# EAGLE board routev2.2 (EAGLE 8.6.0)
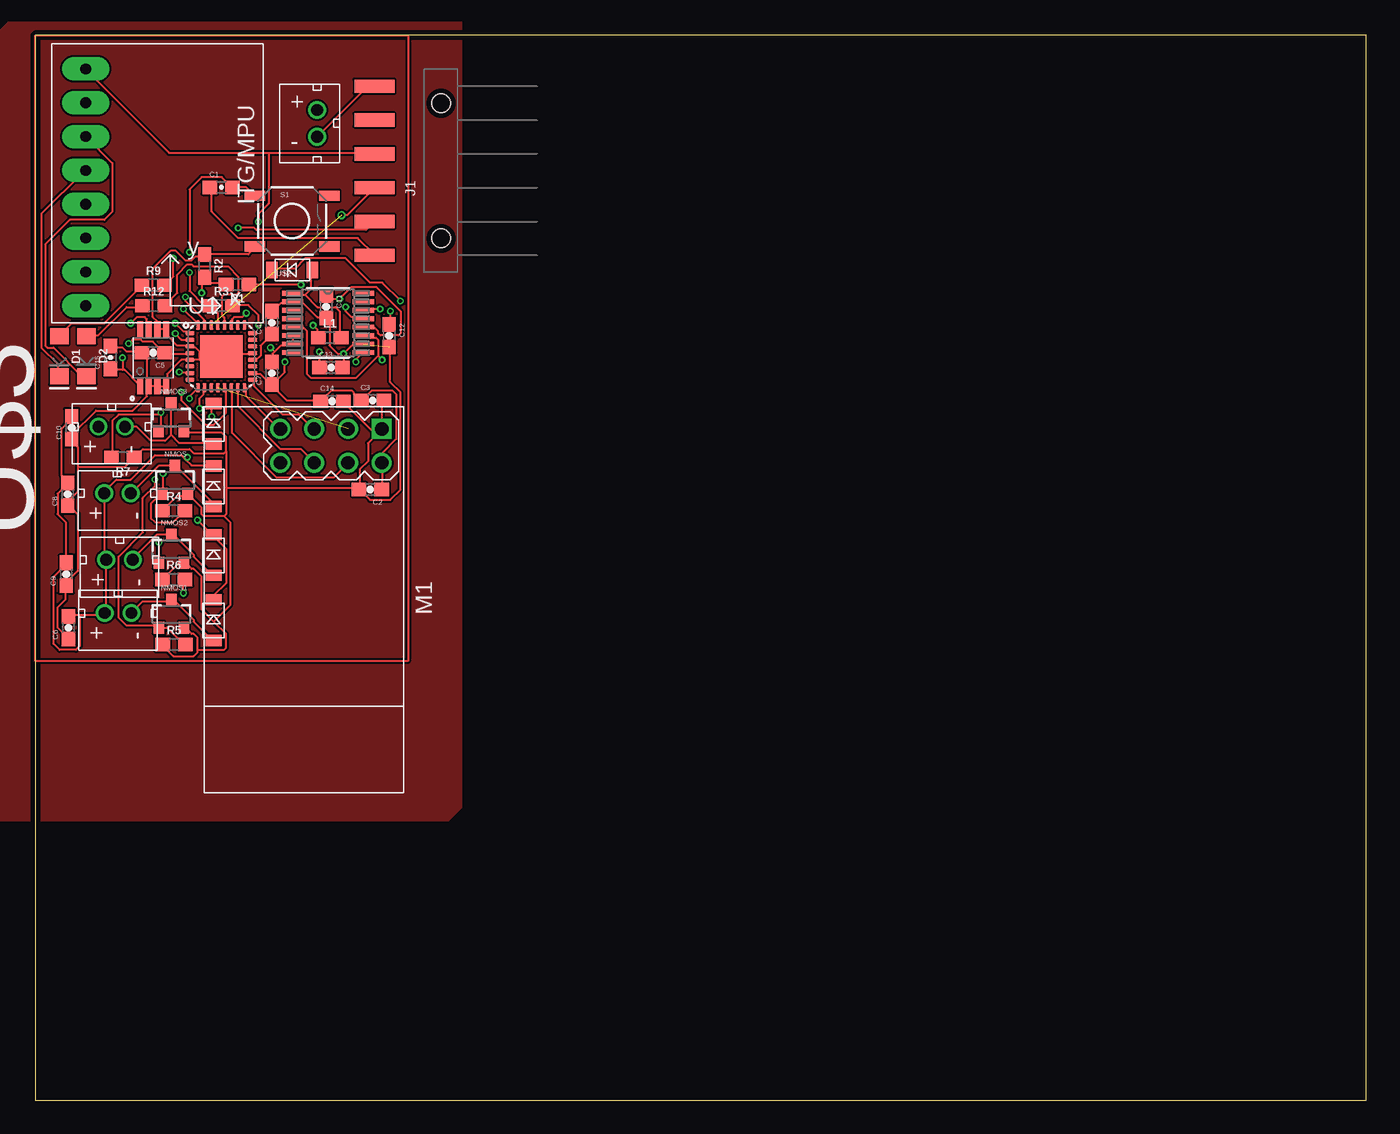
[diagram p0: board, top side]
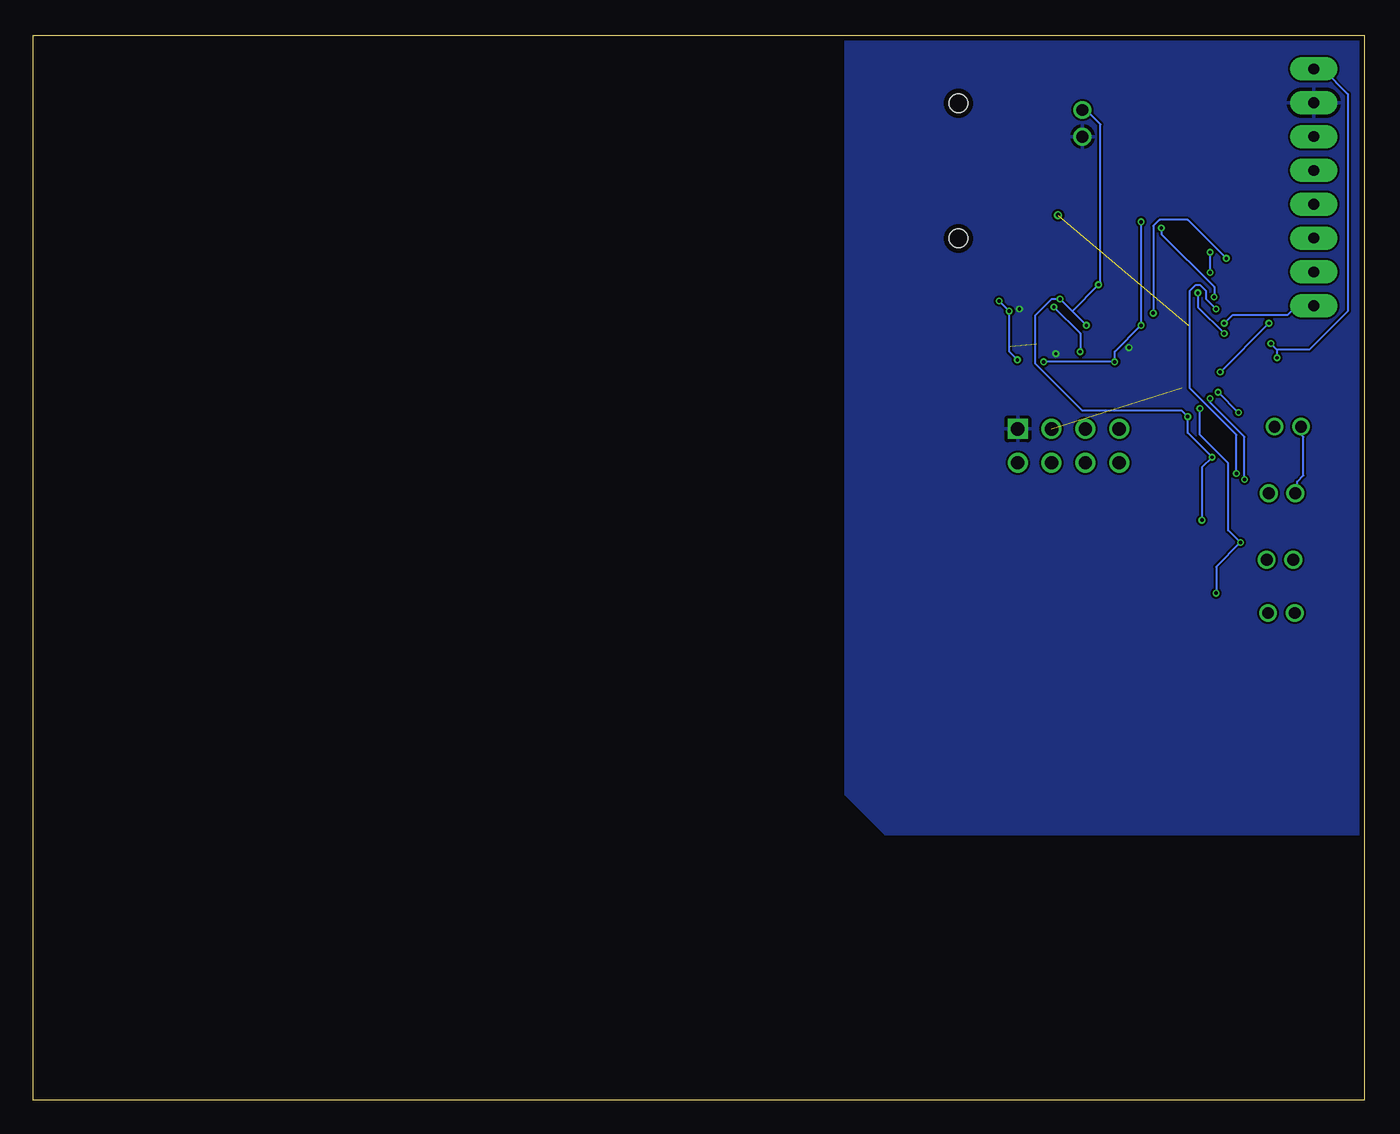
[diagram p1: board, bottom side, seen from below]

Size 100 x 80 mm. Coordinates in mm from the lower left corner, seen from the top.
Outline: 0,0 100,0 100,80 0,80 0,0
Copper layers (1*16): Top 0.035559375mm / dielectric 1.6mm / Bottom 0.035559375mm
Design rules "oshpark-2layer": minimum track width 6mil, minimum drill 10mil, track to track 6mil, track to pad 6mil, pad to pad 6mil, via to via 6mil, smd to smd 6mil, copper to edge 15mil, drill to drill 6mil, minimum pad ring 5mil, minimum via ring 5mil, stop-mask expansion 2.5mil, vias tented up to drill 0mil, thermal gap 10mil

## Footprints (pad centres in the part's own frame; a part is rotated, then mirrored left to right if it is on the bottom)
0603-CAP = smd 1.1 x 1: 1 -0.85,0; 2 0.85,0
LED-1206 = smd 1.2 x 1.4: A -1.5,0; C 1.5,0
MINI2-F3-B = smd 1.22 x 0.85: NEG 0,1.55; POS 0,-1.5
FTDI_DEVICE_RA_SMT = smd 1 x 3: 1 -6.35,5; 2 -3.81,5; 3 -1.27,5; 4 1.27,5; 5 3.81,5; 6 6.35,5 | hole 1.4: -5.08,0; 5.08,0
0603 = smd 1.1 x 1: 1 -0.85,0; 2 0.85,0
WIRELESS-NRF24L01 = drill 1 square: 1 -12.7,6.35 | drill 1: 2 -10.16,6.35; 3 -12.7,3.81; 4 -10.16,3.81; 5 -12.7,1.27; 6 -10.16,1.27; 7 -12.7,-1.27; 8 -10.16,-1.27
JST_CONNECTOR_FEMALE = drill 0.889: + 0,1; - 0,-1
SOT23-3 = smd 0.8 x 0.9: 1 -0.95,-1; 2 0.95,-1; 3 0,1.1
TACTILE-SWITCH-SMD = smd 1.524 x 0.762: 1 -2.794,1.905; 2 2.794,1.905; 3 -2.794,-1.905; 4 2.794,-1.905
MLF32-PAD = smd 0.7 x 0.3: 1 -2.35,1.75; 2 -2.35,1.25; 3 -2.35,0.75; 4 -2.35,0.25; 5 -2.35,-0.25; 6 -2.35,-0.75; 7 -2.35,-1.25; 8 -2.35,-1.75; 17 2.35,-1.75; 18 2.35,-1.25; 19 2.35,-0.75; 20 2.35,-0.25; 21 2.35,0.25; 22 2.35,0.75; 23 2.35,1.25; 24 2.35,1.75 | smd 0.3 x 0.7: 9 -1.75,-2.35; 10 -1.25,-2.35; 11 -0.75,-2.35; 12 -0.25,-2.35; 13 0.25,-2.35; 14 0.75,-2.35; 15 1.25,-2.35; 16 1.75,-2.35; 25 1.75,2.35; 26 1.25,2.35; 27 0.75,2.35; 28 0.25,2.35; 29 -0.25,2.35; 30 -0.75,2.35; 31 -1.25,2.35; 32 -1.75,2.35 | smd 3.2 x 3.2: PAD 0,0
GY-521 = drill 0.8 pad 1.778 long: ADO -8.89,-6.35; GND -8.89,6.35; INT -8.89,-8.89; SCL -8.89,3.81; SDA -8.89,1.27; VCC -8.89,8.89; XCL -8.89,-3.81; XDA -8.89,-1.27
21-0055H_16 = smd 1.6 x 0.356: 1 -2.654,2.223; 2 -2.654,1.587; 3 -2.654,0.953; 4 -2.654,0.318; 5 -2.654,-0.318; 6 -2.654,-0.953; 7 -2.654,-1.587; 8 -2.654,-2.223; 9 2.654,-2.223; 10 2.654,-1.587; 11 2.654,-0.953; 12 2.654,-0.318; 13 2.654,0.318; 14 2.654,0.953; 15 2.654,1.587; 16 2.654,2.223
SOP65P490X110-8N = smd 1.25 x 0.46: 1 -2.11,0.975; 2 -2.11,0.325; 3 -2.11,-0.325; 4 -2.11,-0.975; 5 2.11,-0.975; 6 2.11,-0.325; 7 2.11,0.325; 8 2.11,0.975

## Placement (x,y rotation side)
C1  100nF  [0603-CAP]  13.97,68.58 0 top
C2  10uF  [0603-CAP]  25.17,45.89 180 top
C3  100nF  [0603-CAP]  25.33,52.57 0 top
C4  100nF  [0603-CAP]  17.78,58.42 90 top
C5  100nF  [0603-CAP]  8.85,56.16 180 top
C6  100uF  [0603-CAP]  2.49,35.5 90 top
C7  100nF  [0603-CAP]  17.78,54.61 90 top
C8  100uF  [0603-CAP]  2.44,45.53 90 top
C9  100uF  [0603-CAP]  2.33,39.53 90 top
C10  100uF  [0603-CAP]  2.74,50.53 90 top
C11  100uF  [0603-CAP]  21.86,59.63 270 top
C12  100uF  [0603-CAP]  26.59,57.44 270 top
C13  0.1uF  [0603-CAP]  22.21,55.05 0 top
C14  4.7uF  [0603-CAP]  22.29,52.51 0 top
C15  100nF  [0603-CAP]  5.65,55.81 90 top
D1  Yellow  [LED-1206]  1.81,55.88 270 top
D2  Yellow  [LED-1206]  3.85,55.91 270 top
DIODE  DB2W40300L  [MINI2-F3-B]  13.39,46.1 0 top
DIODE1  DB2W40300L  [MINI2-F3-B]  13.39,36.05 0 top
DIODE2  DB2W40300L  [MINI2-F3-B]  13.39,40.94 0 top
DIODE3  DB2W40300L  [MINI2-F3-B]  13.39,50.8 0 top
DIODE4  DB2W40300L  [MINI2-F3-B]  19.33,62.37 90 top
J1  FTDI_DEVICERA_SMT  [FTDI_DEVICE_RA_SMT]  30.48,69.82 90 top
L1  10uH  [0603]  22.13,57.28 0 top
M1  WIRELESS-NRF24L01  [WIRELESS-NRF24L01]  19.68,37.74 270 top
MOTOR  JST_CONNECTOR_FEMALE  [JST_CONNECTOR_FEMALE]  6.17,45.61 90 top
MOTOR1  JST_CONNECTOR_FEMALE  [JST_CONNECTOR_FEMALE]  6.22,36.61 90 top
MOTOR2  JST_CONNECTOR_FEMALE  [JST_CONNECTOR_FEMALE]  6.33,40.61 90 top
MOTOR3  JST_CONNECTOR_FEMALE  [JST_CONNECTOR_FEMALE]  5.74,50.61 90 top
NMOS  N-CHANNEL-MOSFET-IRLML6244TRPBF  [SOT23-3]  10.5,46.56 0 top
NMOS1  N-CHANNEL-MOSFET-IRLML6244TRPBF  [SOT23-3]  10.23,36.51 0 top
NMOS2  N-CHANNEL-MOSFET-IRLML6244TRPBF  [SOT23-3]  10.23,41.4 0 top
NMOS3  N-CHANNEL-MOSFET-IRLML6244TRPBF  [SOT23-3]  10.2,51.26 0 top
R1  2.2k  [0603]  15.19,61.28 180 top
R2  2.2k  [0603]  12.72,62.68 270 top
R3  10k  [0603]  13.97,59.69 0 top
R4  10k  [0603]  10.39,44.29 0 top
R5  10k  [0603]  10.42,34.24 0 top
R6  10k  [0603]  10.39,39.13 0 top
R7  10k  [0603]  6.58,48.28 180 top
R9  1k  [0603]  8.86,61.23 0 top
R12  1k  [0603]  8.89,59.69 0 top
S1  SWITCH-MOMENTARY-2SMD  [TACTILE-SWITCH-SMD]  19.29,66.04 0 top
U1  3.3V  [MLF32-PAD]  13.97,55.88 0 top
U2  GY-521MPU6050  [GY-521]  12.67,68.58 0 top
U$1  JST_CONNECTOR_FEMALE  [JST_CONNECTOR_FEMALE]  21.17,73.39 0 top
U$2  MAX1672'MAX1672'  [21-0055H_16]  21.99,58.4 0 top
U$3  LTC6930CMS8-8.19LTC6930CMS8-8.19  [SOP65P490X110-8N]  8.85,55.77 90 top

## Library data of the parts
C1 C15 = SparkFun-Capacitors; PROD_ID: CAP-00810
C2-C14 = SparkFun-Passives
D1 D2 = SparkFun-LED; PROD_ID: DIO-09909
DIODE DIODE1-DIODE4 M1 MOTOR MOTOR1-MOTOR3 U2 U$1 = quad
J1 = quad; PROD_ID: CONN-08971
L1 = SparkFun-Coils; PROD_ID: NDUC-07874
NMOS NMOS1-NMOS3 = quad; DATASHEET: http://www.mouser.com/ds/2/196/irlml6244pbf-936666.pdf; MOUSER: 942-IRLML6244TRPBF; URL: http://www.mouser.com/Search/ProductDetail.aspx?R=IRLML6244TRPBFvirtualkey57370000virtualkey942-IRLML6244TRPBF
R1-R7 R9 R12 = SparkFun-Resistors; PROD_ID: RES-08272
S1 = quad; PROD_ID: SWCH-08247
U1 = SparkFun-DigitalIC
U$2 = voltreg
U$3 = LTC6390

## Nets
BATTERY+: C6.2 C8.2 C9.2 C10.2 C11.1 DIODE1.NEG DIODE2.NEG DIODE3.NEG DIODE.NEG L1.1 MOTOR1.+ MOTOR2.+ MOTOR3.+ MOTOR.+ R1.1 U$1.+ U$2.12
FTDI-RX: J1.3 U1.30
FTDI-TX: J1.2 U1.31
GND: C2.2 C3.2 C4.2 C5.2 C6.1 C7.2 C8.1 C9.1 C10.1 C11.2 C12.2 C13.2 C14.2 C15.2 J1.6 M1.1 NMOS1.2 NMOS2.2 NMOS3.2 NMOS.2 R2.1 R4.1 R5.1 R6.1 R7.1 S1.3 U1.3 U1.5 U1.21 U1.PAD U2.GND U$1.- U$2.2 U$2.6 U$2.7 U$2.10 U$2.14 U$3.2 U$3.3 U$3.4 U$3.5 U$3.6
IMU-INT: U1.1 U2.INT
IMU-SCL: D2.C U2.SCL
IMU-SDA: D1.C U2.SDA
MEASURE_PIN: R1.2 R2.2 U1.2
MOTOR1: NMOS.1 R4.2 U1.32
MOTOR2: NMOS1.1 R5.2 U1.9
MOTOR3: NMOS2.1 R6.2 U1.10
MOTOR4: NMOS3.1 R7.2 U1.13
N$1: DIODE4.POS L1.2 U$2.1
N$2: C4.1 U1.20
N$3: R9.2 U1.27
N$4: DIODE1.POS MOTOR1.- NMOS1.3
N$5: DIODE2.POS MOTOR2.- NMOS2.3
N$6: DIODE.POS MOTOR.- NMOS.3
N$7: DIODE3.POS MOTOR3.- NMOS3.3
N$8: D1.A R9.1
N$9: D2.A R12.1
N$10: R12.2 U1.28
N$13: C1.1 J1.1
OSC1: U1.7 U$3.7
RESET: C1.2 R3.1 S1.1 U1.29
RF-CE: M1.3 U1.12
RF-CSN: M1.4 U1.14
RF-MISO: M1.7 U1.16
RF-MOSI: M1.6 U1.15
RF-SCK: M1.5 U1.17
VCC: C2.1 C3.1 C5.1 C7.1 C14.1 C15.1 J1.4 M1.2 R3.2 U1.4 U1.18 U2.VCC U$2.9 U$3.1 U$3.8
VR-PS: C12.1 DIODE4.NEG U$2.5 U$2.11
VR-REF: C13.1 U$2.13

## Tracks (layer width: path | path; a pad name or v marks a point on that pad's centre or on a via)
BATTERY+  (via drill 0.25)
  Top 0.152: v20.88,58.22 21.18,57.91 21.18,57.3 L1.1 | C11.1 21.95,60.35 22.1,60.2 v22.86,60.2 23.77,61.11 25.6,61.11 27.43,59.28 27.43,57.61 27.28,57.45 25.91,57.45 25.76,57.61 25.76,57.76 25.45,58.06 24.69,58.06 U$2.12 | v19.96,61.27 16.15,61.27 R1.1 | C10.2 2.59,51.36 2.59,51.05 1.98,50.44 1.98,46.94 2.44,46.48 C8.2 2.44,46.33 1.68,45.57 1.68,44.04 2.29,43.43 2.29,40.39 C9.2 2.29,40.23 1.37,39.32 1.37,34.29 1.83,33.83 3.05,33.83 3.35,34.14 3.35,36.42 | 3.35,36.42 5.03,36.42 5.18,36.58 MOTOR1.+ 5.33,36.73 5.33,40.54 MOTOR2.+ 5.18,40.69 5.18,45.57 MOTOR.+ 5.18,45.72 6.1,46.63 7.16,46.63 8.99,48.46 10.97,48.46 11.28,48.16 | 3.35,36.42 2.59,36.42 C6.2 | DIODE1.NEG 13.41,37.64 13.41,37.95 14.33,38.86 14.33,41.45 13.41,42.37 DIODE2.NEG 13.26,42.52 v12.19,43.59 | 11.28,48.16 11.73,47.7 13.26,47.7 DIODE.NEG | v13.26,51.36 13.26,52.27 DIODE3.NEG | 11.28,48.16 v11.43,48.31
  Bottom 0.152: 21.95,59.28 v22.86,60.2 23.47,60.2 24.69,58.98 24.69,55.32 21.18,51.82 13.72,51.82 v13.26,51.36 13.26,50.14 v11.43,48.31 12.19,47.55 v12.19,43.59 | 21.95,59.28 v20.88,58.22 | 21.95,59.28 v19.96,61.27 19.81,61.42 19.81,73.3 20.57,74.07 20.73,74.07 21.03,74.37 U$1.+ | MOTOR3.+ 4.72,50.6 4.72,49.99 4.57,49.84 4.57,46.94 5.03,46.48 5.03,45.72 MOTOR.+
BATTERY_+
  pour Top: -2,81 32,81 32,22 31,21 -4,21 -6,23 -6,77
FTDI-RX  (via drill 0.35)  (1 unrouted)
  Top 0.152: J1.3 23.43,66.5 v23,66.5
FTDI-TX  (via drill 0.25)
  Top 0.152: v11.28,60.35 11.28,60.05 12.65,58.67 12.65,58.37 U1.31 | v15.24,65.53 16.46,65.53 16.61,65.38 24.84,65.38 25.45,65.99 J1.2
  Bottom 0.152: v11.28,60.35 11.28,61.11 15.24,65.08 v15.24,65.53
GND  (via drill 0.25)  (1 unrouted)
  Top 0.152: v23.16,56.08 23.16,55.17 C13.2 | v23.16,56.08 23.77,56.69 24.54,56.69 U$2.10 | C4.2 17.83,59.28 18.44,59.89 19.2,59.89 U$2.2 19.36,59.89 20.12,59.89 21.18,58.83 21.79,58.83 C11.2 21.95,58.67 22.1,58.52 22.1,56.69 22.71,56.08 v23.16,56.08 | 17.98,56.24 18.44,56.69 19.2,56.69 U$2.7 19.36,56.84 19.36,57.3 U$2.6 | 17.98,56.24 17.83,56.08 17.83,55.47 C7.2 | 25.6,49.99 25.91,50.29 M1.1 | 25.6,49.99 24.99,49.38 24.99,48.01 24.38,47.4 24.38,46.02 C2.2 | 25.6,49.99 23.16,52.43 C14.2 | 25.6,49.99 M1.1 | C3.2 26.06,52.43 26.06,50.44 M1.1 | C12.2 26.67,56.54 26.67,53.95 27.43,53.19 27.43,45.87 26.67,45.11 25.15,45.11 24.38,45.87 C2.2 | v25.91,59.44 24.69,59.44 U$2.14 | v17.68,56.54 17.98,56.24 | J1.6 25.45,76.05 24.84,76.05 21.18,72.39 U$1.- | U$3.2 8.53,53.65 9.14,53.65 U$3.3 9.3,53.65 9.75,53.65 U$3.4 9.91,53.8 9.91,54.56 10.97,55.63 11.58,55.63 U1.5 11.73,55.63 12.34,55.63 | C15.2 5.79,56.54 6.55,56.54 6.86,56.24 7.92,56.24 C5.2 8.08,56.08 8.38,55.78 8.38,53.8 U$3.2 | S1.3 16.46,64.01 16,63.55 12.8,63.55 R2.1 12.65,63.4 12.04,63.4 11.73,63.09 11.28,63.09 10.52,63.86 10.21,63.86 8.84,62.48 8.84,58.83 9.14,58.52 9.14,57.91 U$3.6 9.3,57.91 9.75,57.91 U$3.5 9.91,57.76 9.91,57.45 10.67,56.69 11.58,56.69 U1.3 11.73,56.54 12.04,56.54 12.34,56.24 12.34,55.63 | 12.34,55.63 13.72,55.63 U1.PAD 14.17,56.08 16.31,56.08 U1.21 | C6.1 2.44,34.75 1.68,35.51 1.68,37.03 2.29,37.64 2.29,38.56 C9.1 2.44,38.71 2.44,39.01 3.2,39.78 3.2,44.04 2.59,44.65 C8.1 2.59,44.81 2.59,45.11 3.2,45.72 3.2,47.55 | 3.2,47.55 3.2,49.07 2.74,49.53 C10.1 2.74,49.99 4.57,51.82 7.32,51.82 8.38,52.88 8.38,53.65 U$3.2
  Top 0.152: R6.1 9.6,39.17 10.82,40.39 11.12,40.39 NMOS2.2 11.28,40.39 11.73,39.93 11.89,39.93 12.5,39.32 12.5,36.88 13.41,35.97 | 12.19,33.83 12.19,33.68 11.89,33.38 10.36,33.38 9.6,34.14 R5.1 | 12.19,33.83 12.19,34.75 11.89,35.05 11.73,35.05 11.28,35.51 NMOS1.2 | 13.41,35.97 14.33,35.05 14.33,33.98 14.17,33.83 12.19,33.83 | R4.1 9.6,44.35 10.67,45.41 11.43,45.41 NMOS.2 11.58,45.41 12.5,44.5 12.5,44.04 12.65,43.89 14.17,43.89 | 14.33,48.77 14.33,49.84 14.02,50.14 11.28,50.14 NMOS3.2 | 14.33,48.77 14.17,48.62 11.89,48.62 11.58,48.92 8.08,48.92 7.47,48.31 R7.1 7.32,48.16 6.71,47.55 3.2,47.55 | 14.17,43.89 14.33,44.04 14.33,46.02 | 14.33,48.77 14.33,46.02 | 13.41,35.97 14.63,37.19 14.63,43.43 14.17,43.89 | 14.33,46.02 24.23,46.02 C2.2
  pour Bottom: -3,81 39,81 39,23 36,20 -6,20 -6,78
IMU-INT  (via drill 0.25)
  Top 0.152: v10.52,58.37 11.12,57.76 11.58,57.76 U1.1
  Bottom 0.152: v10.52,58.37 9.91,58.98 5.79,58.98 5.18,59.59 3.81,59.59 U2.INT
IMU-SCL
  Top 0.152: D2.C 3.81,54.41 3.5,54.41 1.37,56.54 0.91,56.54 0.76,56.69 0.76,64.31 2.59,66.14 5.18,66.14 5.79,66.75 5.79,70.41 3.81,72.39 U2.SCL
IMU-SDA
  Top 0.152: D1.C 1.68,54.41 1.68,55.32 0.46,56.54 0.46,66.6 3.66,69.8 U2.SDA
MEASURE_PIN  (via drill 0.25)
  Top 0.152: v10.52,57.61 10.97,57.15 11.58,57.15 U1.2 | v12.5,60.66 12.5,61.57 12.65,61.72 R2.2 12.8,61.72 13.11,61.42 14.33,61.42 R1.2
  Bottom 0.152: v10.52,57.61 12.5,59.59 v12.5,60.66
MOTOR1  (via drill 0.25)
  Top 0.152: v11.12,59.44 12.19,58.37 U1.32 | v9.6,47.09 9.6,45.57 NMOS.1 9.45,45.57 8.69,44.81 8.69,43.74 8.99,43.43 10.36,43.43 11.12,44.2 R4.2
  Bottom 0.152: v11.12,59.44 11.89,60.2 11.89,60.81 12.34,61.27 12.65,61.27 13.11,60.81 13.11,53.49 9.6,49.99 v9.6,47.09
MOTOR2  (via drill 0.25)
  Top 0.152: v11.58,52.73 11.58,52.88 12.19,53.49 U1.9 | v8.99,46.63 8.99,46.18 8.08,45.26 8.08,42.67 6.25,40.84 6.25,36.27 6.86,35.66 9.14,35.66 NMOS1.1 9.3,35.51 9.91,35.51 11.12,34.29 R5.2
  Bottom 0.152: v11.58,52.73 11.58,52.43 8.99,49.84 v8.99,46.63
MOTOR3  (via drill 0.25)
  Top 0.152: v12.34,51.97 12.34,52.73 12.65,53.03 12.65,53.49 U1.10 | v9.3,41.91 9.3,40.54 NMOS2.1 | v11.12,38.1 11.12,39.01 R6.2
  Bottom 0.152: v12.34,51.97 12.34,49.99 10.21,47.85 10.21,42.82 v9.3,41.91 11.12,40.08 v11.12,38.1
MOTOR4  (via drill 0.25)
  Top 0.152: v10.97,53.19 10.97,52.58 12.8,50.75 13.41,50.75 14.33,51.66 14.33,53.49 U1.13 | 9.45,51.51 9.45,50.44 9.3,50.29 NMOS3.1 | 9.45,51.51 6.25,51.51 5.79,51.05 5.79,48.31 R7.2 | 9.45,51.51 v9.45,51.66
  Bottom 0.152: v9.45,51.66 v10.97,53.19
N$1
  Top 0.152: 20.27,60.5 21.18,59.59 22.55,59.59 22.86,59.28 22.86,57.3 L1.2 | 20.27,60.5 19.36,60.5 U$2.1 | 20.27,60.5 20.73,60.96 20.73,62.33 DIODE4.POS
N$2
  Top 0.152: U1.20 16.46,55.63 16.61,55.63 16.92,55.93 16.92,56.69 17.68,57.45 C4.1
N$3  (via drill 0.25)
  Top 0.152: v15.85,59.13 15.54,58.83 14.94,58.83 14.78,58.67 14.78,58.37 U1.27 | v10.36,63.25 10.36,61.87 9.75,61.27 R9.2
  Bottom 0.152: v15.85,59.13 15.85,65.68 15.39,66.14 13.26,66.14 v10.36,63.25
N$4
  Top 0.152: MOTOR1.- 7.32,36.73 8.08,37.49 10.21,37.49 NMOS1.3 10.36,37.64 11.89,36.12 11.89,35.97 13.26,34.59 DIODE1.POS
N$5
  Top 0.152: MOTOR2.- 7.32,40.69 9.14,42.52 10.21,42.52 NMOS2.3 10.36,42.52 11.89,41 11.89,40.84 13.26,39.47 DIODE2.POS
N$6
  Top 0.152: MOTOR.- 7.32,45.72 9.3,47.7 10.36,47.7 NMOS.3 10.52,47.7 13.26,44.96 13.26,44.65 DIODE.POS
N$7
  Top 0.152: 10.21,49.99 10.21,52.27 NMOS3.3 | 10.21,49.99 10.82,49.38 13.26,49.38 DIODE3.POS | 10.21,49.99 9.75,49.53 8.69,49.53 7.62,50.6 6.86,50.6 MOTOR3.-
N$8
  Top 0.152: R9.1 7.92,61.11 5.18,58.37 2.74,58.37 1.83,57.45 D1.A
N$9
  Top 0.152: R12.1 7.92,59.59 6.86,59.59 4.72,57.45 3.96,57.45 D2.A
N$10
  Top 0.152: U1.28 14.17,58.37 14.17,58.83 14.02,58.98 14.02,60.35 14.17,60.5 15.09,60.5 15.24,60.66 15.24,61.87 14.48,62.64 11.89,62.64 11.73,62.79 11.43,62.79 10.67,62.03 10.67,60.66 9.75,59.74 R12.2
N$11
  Top 0.152: 0,80 28,80 28,33 0,33 0,80
N$13
  Top 0.152: C1.1 13.26,68.58 13.26,66.75 15.24,64.77 24.23,64.77 25.45,63.55 J1.1
OSC1  (via drill 0.25)
  Top 0.152: v10.82,54.71 11.58,54.71 U1.7 | v7.16,58.37 7.62,58.83 8.23,58.83 8.38,58.67 8.38,57.91 U$3.7
  Bottom 0.152: v7.16,58.37 v10.82,54.71
RESET  (via drill 0.25)
  Top 0.152: U1.29 13.72,58.37 13.72,59.13 13.26,59.59 R3.1 13.11,59.74 12.65,59.74 11.58,60.81 v11.58,62.18 | S1.1 16.46,67.97 15.85,68.58 C1.2 14.78,68.58 14.02,69.34 12.5,69.34 11.58,68.43 v11.58,63.7
  Bottom 0.152: v11.58,63.7 v11.58,62.18
RF-CE  (1 unrouted)
RF-CSN
  Top 0.152: U1.14 14.78,53.49 14.78,50.14 18.14,46.79 22.4,46.79 23.47,47.85 M1.4
RF-MISO
  Top 0.152: U1.16 15.85,53.49 15.85,52.88 18.29,50.44 M1.7
RF-MOSI
  Top 0.152: U1.15 15.24,53.49 15.24,52.12 18.44,48.92 19.96,48.92 20.88,48.01 M1.6
RF-SCK
  Top 0.152: U1.17 16.46,54.1 16.46,53.65 18.59,51.51 19.81,51.51 20.88,50.44 M1.5
VCC  (via drill 0.25)
  Top 0.152: C2.1 26.06,46.02 26.06,47.85 M1.2 26.06,48.01 26.06,48.62 27.13,49.68 27.13,53.03 26.82,53.34 25.3,53.34 24.54,52.58 C3.1 24.38,52.58 23.93,53.03 23.93,53.19 23.77,53.34 22.25,53.34 21.49,52.58 C14.1 21.34,52.58 18.9,52.58 17.83,53.65 C7.1 | U1.18 16.46,54.56 16.92,54.56 17.68,53.8 C7.1 | v16.76,58.22 16.76,58.98 16,59.74 14.94,59.74 R3.2 | v18.75,55.47 18.75,54.71 17.83,53.8 C7.1 | v24.08,55.47 24.08,55.63 24.54,56.08 U$2.9 | 6.55,54.86 6.71,54.86 7.77,53.8 U$3.1 | 6.55,54.86 5.79,54.86 C15.1 | U1.4 11.58,56.08 9.75,56.08 C5.1 9.6,56.24 8.84,57 8.08,57 7.92,57.15 | 7.92,57.15 7.92,57.76 U$3.8 | v6.55,55.78 6.55,54.86 | v7.01,56.84 7.32,57.15 7.92,57.15 | 17.53,71.17 10.06,71.17 3.81,77.42 U2.VCC | 17.53,71.17 25.45,71.17 J1.4 | v16.76,65.99 16.76,66.6 17.53,67.36 17.53,71.17
  Bottom 0.152: v24.08,55.47 v18.75,55.47 18.75,56.24 v16.76,58.22 v16.76,65.99 | 6.55,56.39 v6.55,55.78 | v7.01,56.84 6.55,56.39 | 6.55,56.39 4.12,56.39 1.22,59.28 1.22,75.59 3.05,77.42 3.66,77.42 U2.VCC
VR-PS  (via drill 0.25)
  Top 0.152: v26.67,59.28 26.67,58.37 C12.1 | 25.76,55.93 v26.06,55.63 | 25.76,55.93 25.76,57.15 25.6,57.3 24.69,57.3 U$2.11 | v27.43,60.05 26.06,61.42 25.15,61.42 23.32,63.25 20.27,63.25 19.51,62.48 17.83,62.48 DIODE4.NEG | 25.76,55.93 24.08,54.25 20.73,54.25 20.42,54.56 20.42,57.76 20.12,58.06 19.36,58.06 U$2.5
  Bottom 0.152: v26.06,55.63 26.67,56.24 v26.67,59.28 v27.43,60.05
VR-REF  (via drill 0.25)
  Top 0.152: v21.34,56.24 21.34,55.17 C13.1 | v23.32,59.59 23.32,59.28 23.77,58.83 24.54,58.83 U$2.13
  Bottom 0.152: v21.34,56.24 21.34,57.61 v23.32,59.59